# Altium PCB My_Ship_PCB1.PcbDoc
Units mm, origin at the board's own origin, x right, y up, seen from the top; angles counter-clockwise.
Board outline 152.4 x 101.6 mm, 2 copper layers (Top Layer, Bottom Layer); 104 components, 33 nets, 352 pads, 0 vias.
Unrouted connection lines stored in the file: 1.
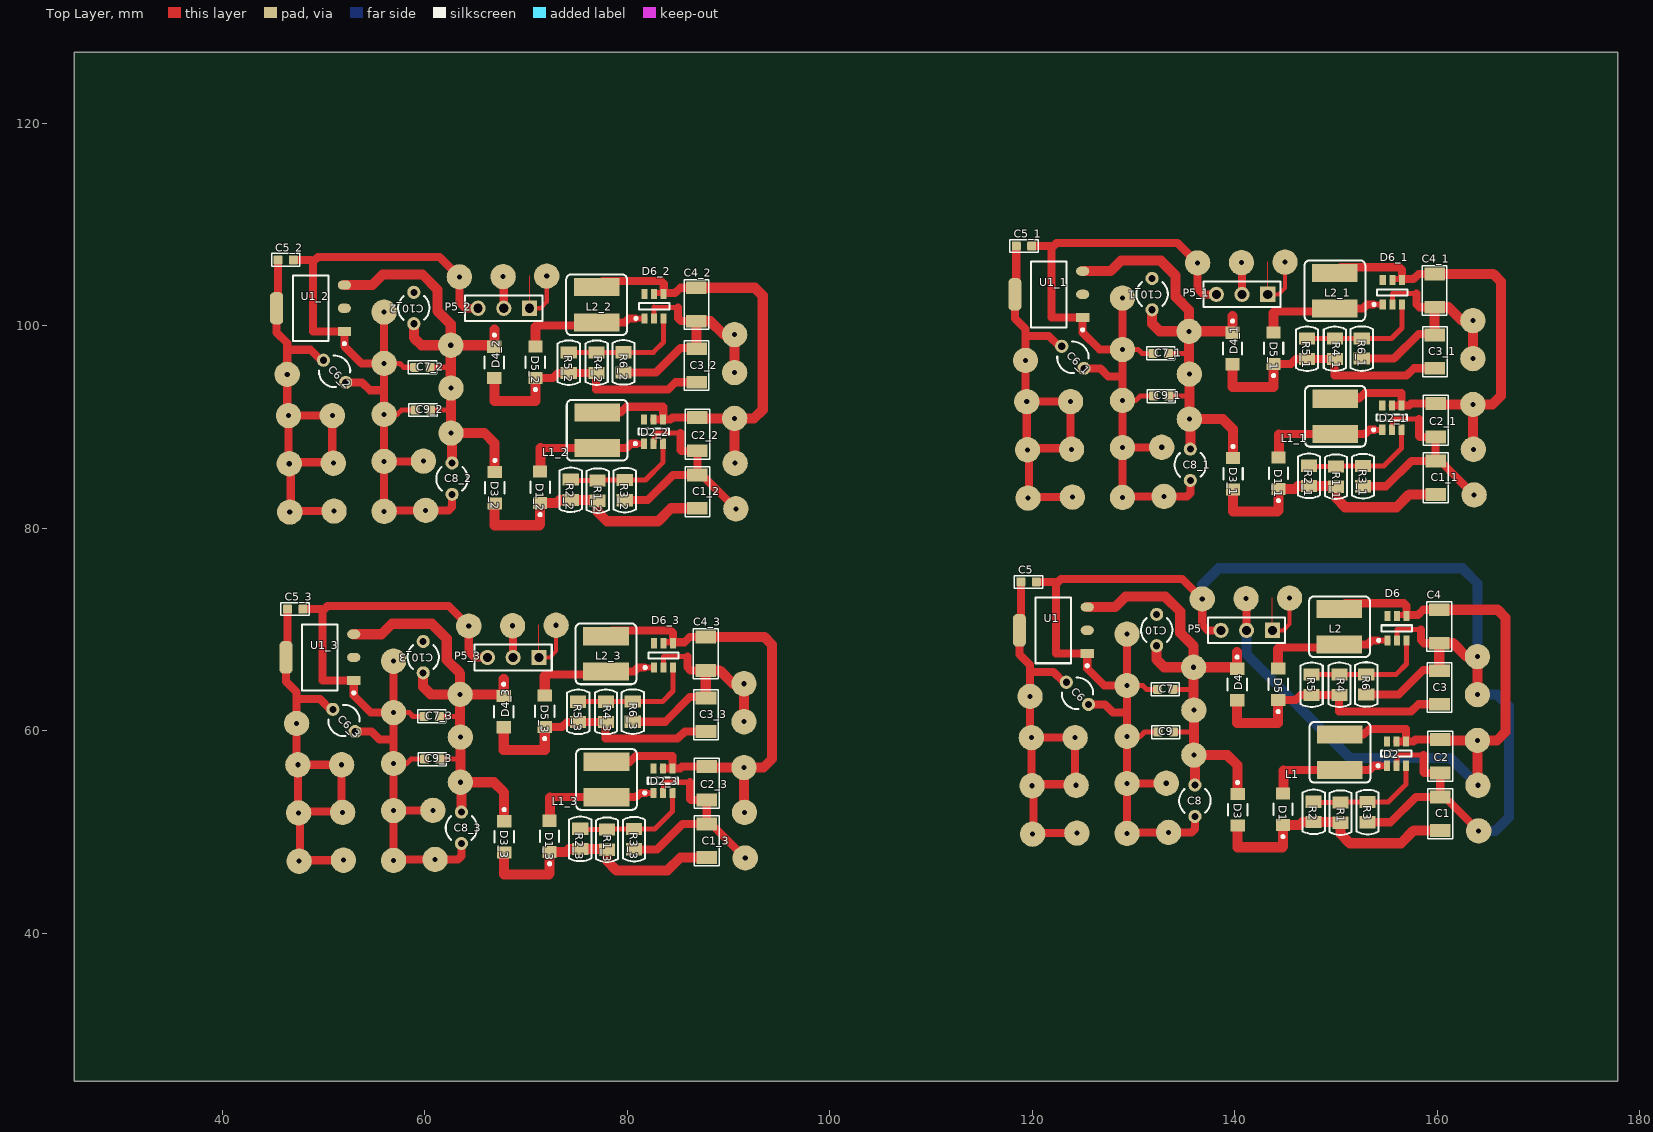
[diagram p0: Top Layer view]
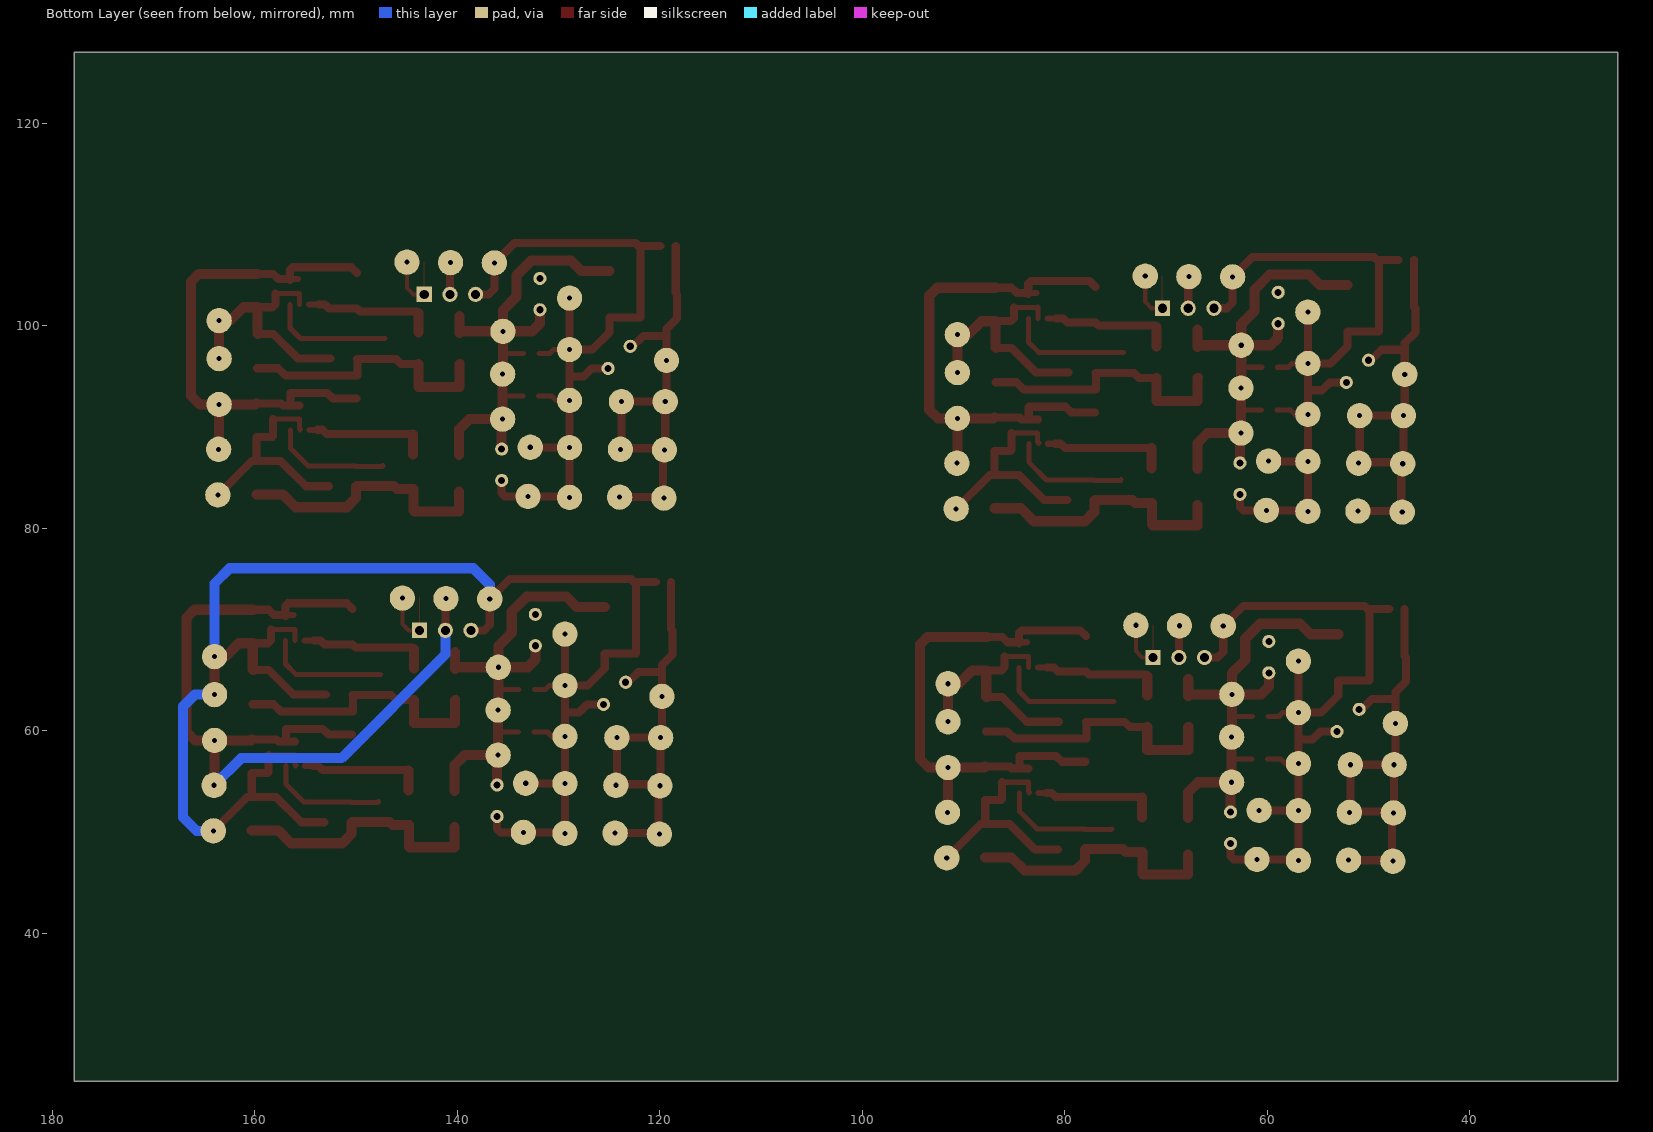
[diagram p1: Bottom Layer view, seen from below]
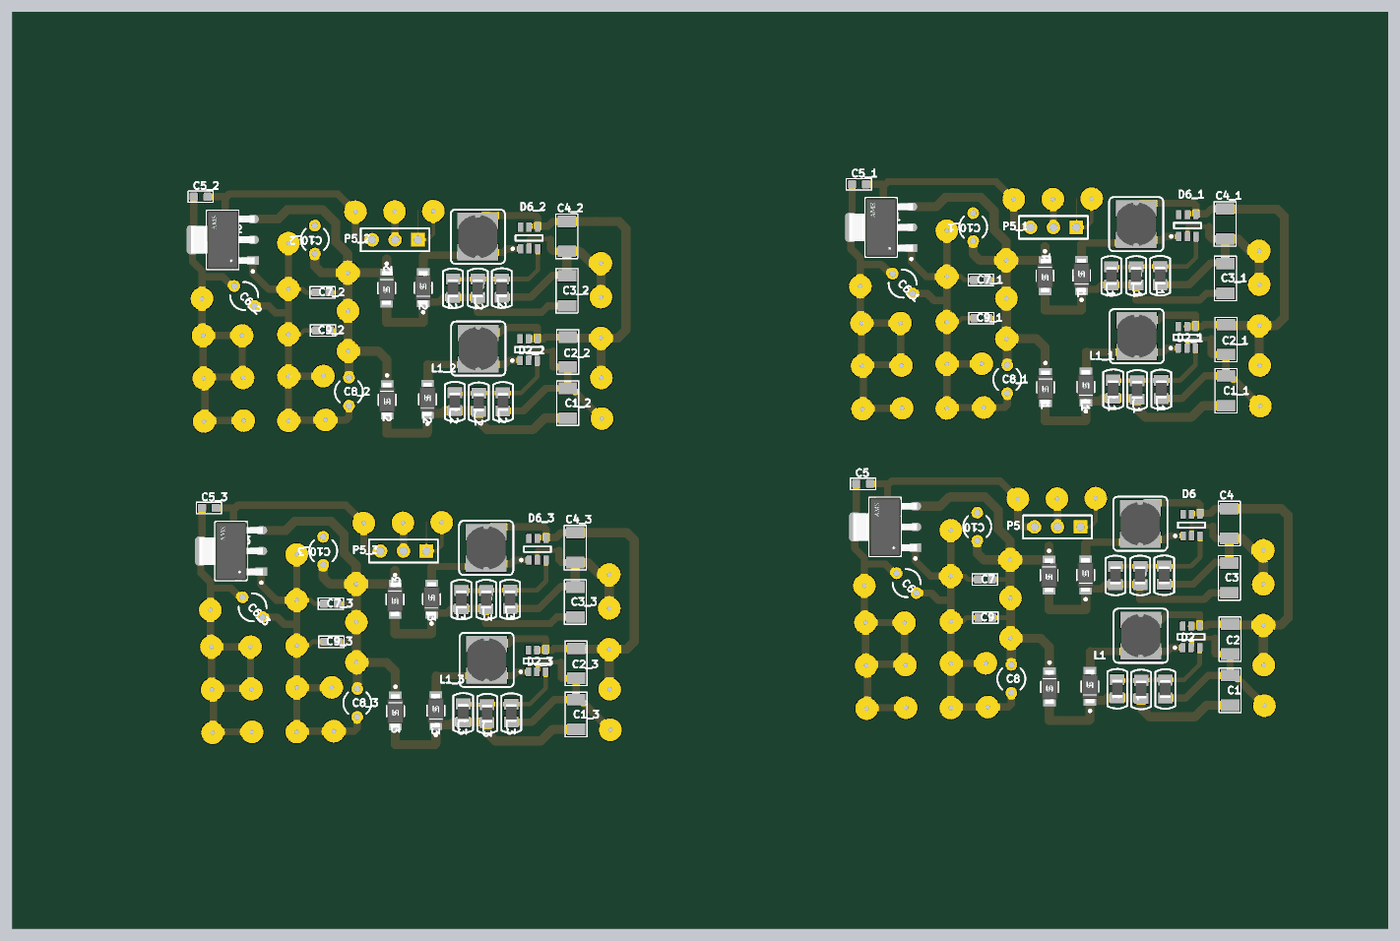
[diagram p2: 3D render of the assembled board from above, using the file's embedded part models]

## Layer stack, top to bottom
Top Solder: solder mask 0.0102, Solder Resist, Dk 3.5
Top Layer: signal copper 0.0356
Dielectric 1: dielectric 0.32, FR-4, Dk 4.8
Bottom Layer: signal copper 0.0356
Bottom Solder: solder mask 0.0102, Solder Resist, Dk 3.5

## Board outline
25.4,25.4 177.8,25.4 177.8,127 25.4,127

## Design rules (kind name [scope] priority, off if disabled: settings)
Clearance [All] p1: gap=0.3
PolygonConnect [All] p1: connectstyle=Relief reliefconductorwidth=0.254 reliefentries=4 polygonreliefangle="90 Angle" airgapwidth=0.254
RoutingVias [All] p1: holewidth=0.711 width=1.27 viastyle="Through Hole" minholewidth=0.711 minwidth=1.27 maxholewidth=0.711 maxwidth=1.27
SolderMaskExpansion [All] p1: expansion=0.102
Width [All] p1: maxlimit=1 minlimit=0.4 preferedwidth=0.8
30 further rules are at their usual default settings.

## Classes and differential pairs
component class My_Ship_Sheet1: C1 C3 C4 C5 C6 C7 C8 C9 C10 D1 D2 D3 D5 D6 L1 L2 P3 P5 R1 R2 R4 R5 U1

## Components (designator, comment, footprint, x,y, rotation, side; value= is the part's Value field where it differs from the comment)
C1 "Cap" C1206 160.275,51.825 r270 top
C1_1 "Cap" C1206 159.825,85 r270 top (schematic designator C1)
C1_2 "Cap" C1206 86.925,83.625 r270 top (schematic designator C1)
C1_3 "Cap" C1206 87.85,49.15 r270 top (schematic designator C1)
C2 "Cap" C1206 160.275,57.5 r90 top
C2_1 "Cap" C1206 159.825,90.675 r90 top (schematic designator C2)
C2_2 "Cap" C1206 86.925,89.3 r90 top (schematic designator C2)
C2_3 "Cap" C1206 87.85,54.825 r90 top (schematic designator C2)
C3 "Cap" C1206 160.2,64.275 r270 top
C3_1 "Cap" C1206 159.75,97.45 r270 top (schematic designator C3)
C3_2 "Cap" C1206 86.85,96.075 r270 top (schematic designator C3)
C3_3 "Cap" C1206 87.775,61.6 r270 top (schematic designator C3)
C4 "Cap" C1206 160.175,70.3 r90 top
C4_1 "Cap" C1206 159.725,103.475 r90 top (schematic designator C4)
C4_2 "Cap" C1206 86.825,102.1 r90 top (schematic designator C4)
C4_3 "Cap" C1206 87.75,67.625 r90 top (schematic designator C4)
C5 "C0603" C0603 119.625,74.7 r90 top
C5_1 "C0603" C0603 119.175,107.875 r90 top (schematic designator C5)
C5_2 "C0603" C0603 46.275,106.5 r90 top (schematic designator C5)
C5_3 "C0603" C0603 47.2,72.025 r90 top (schematic designator C5)
C6 "Capacitor-T" R38 124.45,63.7 r45 top
C6_1 "Capacitor-T" R38 124,96.875 r45 top (schematic designator C6)
C6_2 "Capacitor-T" R38 51.1,95.5 r45 top (schematic designator C6)
C6_3 "Capacitor-T" R38 52.025,61.025 r45 top (schematic designator C6)
C7 "C0603" C0603 133.125,64.1 r270 top
C7_1 "C0603" C0603 132.675,97.275 r270 top (schematic designator C7)
C7_2 "C0603" C0603 59.775,95.9 r270 top (schematic designator C7)
C7_3 "C0603" C0603 60.7,61.425 r270 top (schematic designator C7)
C8 "Capacitor-T" R38 136.05,53.1 r0 top
C8_1 "Capacitor-T" R38 135.6,86.275 r0 top (schematic designator C8)
C8_2 "Capacitor-T" R38 62.7,84.9 r0 top (schematic designator C8)
C8_3 "Capacitor-T" R38 63.625,50.425 r0 top (schematic designator C8)
C9 "C0603" C0603 133.175,59.875 r270 top
C9_1 "C0603" C0603 132.725,93.05 r270 top (schematic designator C9)
C9_2 "C0603" C0603 59.825,91.675 r270 top (schematic designator C9)
C9_3 "C0603" C0603 60.75,57.2 r270 top (schematic designator C9)
C10 "Capacitor-T" R38 132.275,69.95 r180 top
C10_1 "Capacitor-T" R38 131.825,103.125 r180 top (schematic designator C10)
C10_2 "Capacitor-T" R38 58.925,101.75 r180 top (schematic designator C10)
C10_3 "Capacitor-T" R38 59.85,67.275 r180 top (schematic designator C10)
D1 "SS34LWHRVG" FP-SS34LWH-MFG 144.75,52.25 r90 top
D1_1 "SS34LWHRVG" FP-SS34LWH-MFG 144.3,85.425 r90 top (schematic designator D1)
D1_2 "SS34LWHRVG" FP-SS34LWH-MFG 71.4,84.05 r90 top (schematic designator D1)
D1_3 "SS34LWHRVG" FP-SS34LWH-MFG 72.325,49.575 r90 top (schematic designator D1)
D2 "SX1308" SX1308 155.95,57.75 r90 top
D2_1 "SX1308" SX1308 155.5,90.925 r90 top (schematic designator D2)
D2_2 "SX1308" SX1308 82.6,89.55 r90 top (schematic designator D2)
D2_3 "SX1308" SX1308 83.525,55.075 r90 top (schematic designator D2)
D3 "SS34LWHRVG" FP-SS34LWH-MFG 140.275,52.2 r270 top
D3_1 "SS34LWHRVG" FP-SS34LWH-MFG 139.825,85.375 r270 top (schematic designator D3)
D3_2 "SS34LWHRVG" FP-SS34LWH-MFG 66.925,84 r270 top (schematic designator D3)
D3_3 "SS34LWHRVG" FP-SS34LWH-MFG 67.85,49.525 r270 top (schematic designator D3)
D4 "SS34LWHRVG" FP-SS34LWH-MFG 140.225,64.575 r270 top
D4_1 "SS34LWHRVG" FP-SS34LWH-MFG 139.775,97.75 r270 top (schematic designator D4)
D4_2 "SS34LWHRVG" FP-SS34LWH-MFG 66.875,96.375 r270 top (schematic designator D4)
D4_3 "SS34LWHRVG" FP-SS34LWH-MFG 67.8,61.9 r270 top (schematic designator D4)
D5 "SS34LWHRVG" FP-SS34LWH-MFG 144.275,64.6 r90 top
D5_1 "SS34LWHRVG" FP-SS34LWH-MFG 143.825,97.775 r90 top (schematic designator D5)
D5_2 "SS34LWHRVG" FP-SS34LWH-MFG 70.925,96.4 r90 top (schematic designator D5)
D5_3 "SS34LWHRVG" FP-SS34LWH-MFG 71.85,61.925 r90 top (schematic designator D5)
D6 "SX1308" SX1308 156,70.125 r90 top
D6_1 "SX1308" SX1308 155.55,103.3 r90 top (schematic designator D6)
D6_2 "SX1308" SX1308 82.65,101.925 r90 top (schematic designator D6)
D6_3 "SX1308" SX1308 83.575,67.45 r90 top (schematic designator D6)
L1 "Coil" МДГ-1 150.375,57.875 r90 top
L1_1 "Coil" МДГ-1 149.925,91.05 r90 top (schematic designator L1)
L1_2 "Coil" МДГ-1 77.025,89.675 r90 top (schematic designator L1)
L1_3 "Coil" МДГ-1 77.95,55.2 r90 top (schematic designator L1)
L2 "Coil" МДГ-1 150.325,70.275 r90 top
L2_1 "Coil" МДГ-1 149.875,103.45 r90 top (schematic designator L2)
L2_2 "Coil" МДГ-1 76.975,102.075 r90 top (schematic designator L2)
L2_3 "Coil" МДГ-1 77.9,67.6 r90 top (schematic designator L2)
P5 "Header 3" HDR1X3 143.7,69.925 r180 top
P5_1 "Header 3" HDR1X3 143.25,103.1 r180 top (schematic designator P5)
P5_2 "Header 3" HDR1X3 70.35,101.725 r180 top (schematic designator P5)
P5_3 "Header 3" HDR1X3 71.275,67.25 r180 top (schematic designator P5)
R1 "R0805" R0805 150.425,51.925 r270 top
R1_1 "R0805" R0805 149.975,85.1 r270 top (schematic designator R1)
R1_2 "R0805" R0805 77.075,83.725 r270 top (schematic designator R1)
R1_3 "R0805" R0805 78,49.25 r270 top (schematic designator R1)
R2 "R0805" R0805 147.775,52 r270 top
R2_1 "R0805" R0805 147.325,85.175 r270 top (schematic designator R2)
R2_2 "R0805" R0805 74.425,83.8 r270 top (schematic designator R2)
R2_3 "R0805" R0805 75.35,49.325 r270 top (schematic designator R2)
R3 "R0805" R0805 153.1,51.975 r90 top
R3_1 "R0805" R0805 152.65,85.15 r90 top (schematic designator R3)
R3_2 "R0805" R0805 79.75,83.775 r90 top (schematic designator R3)
R3_3 "R0805" R0805 80.675,49.3 r90 top (schematic designator R3)
R4 "R0805" R0805 150.325,64.55 r270 top
R4_1 "R0805" R0805 149.875,97.725 r270 top (schematic designator R4)
R4_2 "R0805" R0805 76.975,96.35 r270 top (schematic designator R4)
R4_3 "R0805" R0805 77.9,61.875 r270 top (schematic designator R4)
R5 "R0805" R0805 147.575,64.55 r270 top
R5_1 "R0805" R0805 147.125,97.725 r270 top (schematic designator R5)
R5_2 "R0805" R0805 74.225,96.35 r270 top (schematic designator R5)
R5_3 "R0805" R0805 75.15,61.875 r270 top (schematic designator R5)
R6 "R0805" R0805 152.975,64.575 r90 top
R6_1 "R0805" R0805 152.525,97.75 r90 top (schematic designator R6)
R6_2 "R0805" R0805 79.625,96.375 r90 top (schematic designator R6)
R6_3 "R0805" R0805 80.55,61.9 r90 top (schematic designator R6)
U1 "AMS1117-3.3" FP-AMS1117-IPC_B 122.075,69.925 r180 top
U1_1 "AMS1117-3.3" FP-AMS1117-IPC_B 121.625,103.1 r180 top (schematic designator U1)
U1_2 "AMS1117-3.3" FP-AMS1117-IPC_B 48.725,101.725 r180 top (schematic designator U1)
U1_3 "AMS1117-3.3" FP-AMS1117-IPC_B 49.65,67.25 r180 top (schematic designator U1)

## Footprints (in the part's own frame and the unit in brackets; to place one, negate y for a bottom-side part, rotate by r counter-clockwise, add the part's x,y. Pads: shape width x height; smd on the part's side, far side on the other; paste and mask are expansions set on the pad)
C0603 [mil]
  rrect25% 35x35 smd: 1(0,30) 2(0,-30)
  silkscreen extent -25,-55 25,55, body extent -18,-36 19,32, height 51
C1206 [mil]
  rect 50x80 smd: 1(-65,0) 2(65,0)
  silkscreen extent -97,-48 97,48, body extent -81,-45 82,47, height 79
FP-AMS1117-IPC_B [mm]
  rect 1.304x0.912 smd paste+0 mask+0: 1(-3.345,2.29)
  rrect100% 1.304x0.912 smd paste+0 mask+0: 2(-3.345,0) 3(-3.345,-2.29)
  rrect70% 1.304x3.222 smd paste+0 mask+0: 4(3.345,0)
  silkscreen extent -3.47,-3.25 1.75,3.62, body extent -4.25,-3.5 4.25,3.5, height 0.25
FP-SS34LWH-MFG [mm]
  rect 1.2x1.4 smd paste+0 mask+0: 1(-1.55,0) 2(1.55,0)
  silkscreen extent -2.82,-0.95 0.58,0.95, body extent -2.25,-1.05 2.25,1.05, height 0.25
HDR1X3 [mm] "Connector; Header; 3 Position"
  rect 1.5x1.5 hole 0.9: 1(0,0)
  round 1.5 hole 0.9: 2(2.54,0) 3(5.08,0)
  silkscreen extent -1.27,-1.27 6.35,1.27
R38 [mm] "Crystal, Thru-Hole; 2 Leads; Body 3.1 x 8.2 mm (Dia.xH)"
  round 1.3 hole 0.7: 1(0,1.55) 2(0,-1.55)
  silkscreen extent -1.55,-1.19 1.55,1.17
R0805 [mm] "2012M"
  rect 1.2x1.6 smd: 1(-1,0) 2(1,0)
  silkscreen extent -2.2,-1.1 2.2,1.1, body extent -1,-0.6 1,0.6, height 0.5
SX1308 [mm] "SOT23, 6-Leads, Body 2,90x2,45mm, Pitch 0,95mm, IPC Medium Density"
  rect 1x0.6 smd: 1(-1.2,0.95) 2(-1.2,0) 3(-1.2,-0.95) 4(1.2,-0.95) 5(1.2,0) 6(1.2,0.95)
  silkscreen extent -1.32,-1.5 0.3,1.92, body extent -0.7,-1.5 0.7,1.5, height 1.1
МДГ-1 [mm]
  rect 1.8x4.5 smd: 1(-1.75,0) 2(1.75,0)
  Top Layer pour cut-out: -0.85,2.25 0.85,2.25 0.85,-2.25 -0.85,-2.25
  silkscreen extent -3,-3 3,3, body extent -2.4,-2.15 2.4,2.15, height 3.5

## Part data
C1 C1_1 C1_2 C1_3 C2 C2_1 C2_2 C2_3 C3 C3_1 C3_2 C3_3 C4 C4_1 C4_2 C4_3: "Capacitor"
C5 C5_1 C5_2 C5_3 C7 C7_1 C7_2 C7_3 C9 C9_1 C9_2 C9_3: library part Cap, "Capacitor"
D1 D1_1 D1_2 D1_3 D3 D3_1 D3_2 D3_3 D4 D4_1 D4_2 D4_3 D5 D5_1 D5_2 D5_3: library part CMP-15604-000001-1, "DIODE SCHOTTKY 40V 3A SOD123W"
L1 L1_1 L1_2 L1_3 L2 L2_1 L2_2 L2_3: library part МДГ1-1500
P5 P5_1 P5_2 P5_3: "Header, 3-Pin"
R1 R1_1 R1_2 R1_3 R2 R2_1 R2_2 R2_3 R3 R3_1 R3_2 R3_3 R4 R4_1 R4_2 R4_3 R5 R5_1 R5_2 R5_3 R6 R6_1 R6_2 R6_3: library part Res1, "Resistor"
U1 U1_1 U1_2 U1_3: library part CMP-209535-000001-1, "LDO Voltage Regulators 1A, 3.3V"

## Free pads (board coordinates)
  round 2.5 hole 0.5: 3(72.05,104.9) 3(72.975,70.425) 3(144.95,106.275) 3(145.4,73.1) 4(63.425,104.825) 4(64.35,70.35) 4(67.75,104.85) 4(68.675,70.375) 4(136.325,106.2) 4(136.775,73.025) 4(140.65,106.225) 4(141.1,73.05) 7(90.6,99.125) 7(91.525,64.65) 7(163.5,100.5) 7(163.95,67.325) 8(90.725,81.925) 8(91.65,47.45) 8(163.625,83.3) 8(164.075,50.125) 9(90.6,95.375) 9(91.525,60.9) 9(163.5,96.75) 9(163.95,63.575) 10(90.6,90.85) 10(90.65,86.425) 10(91.525,56.375) 10(91.575,51.95) 10(163.5,92.225) 10(163.55,87.8) 10(163.95,59.05) 10(164,54.625) 11(62.575,98.075) 11(63.5,63.6) 11(135.475,99.45) 11(135.925,66.275) 12(62.6,93.85) 12(63.525,59.375) 12(135.5,95.225) 12(135.95,62.05) 13(62.6,89.4) 13(63.525,54.925) 13(135.5,90.775) 13(135.95,57.6) 15(56,101.35) 15(56.925,66.875) 15(128.9,102.725) 15(129.35,69.55) 16(56,96.275) 16(56.925,61.8) 16(128.9,97.65) 16(129.35,64.475) 17(56,91.25) 17(56.925,56.775) 17(128.9,92.625) 17(129.35,59.45) 18(56,86.6) 18(56.925,52.125) 18(128.9,87.975) 18(129.35,54.8) 19(56,81.675) 19(56.925,47.2) 19(59.875,86.625) 19(60.1,81.775) 19(60.8,52.15) 19(61.025,47.3) 19(128.9,83.05) 19(129.35,49.875) 19(132.775,88) 19(133,83.15) 19(133.225,54.825) 19(133.45,49.975) 20(46.425,95.2) 20(47.35,60.725) 20(119.325,96.575) 20(119.775,63.4) 21(50.975,86.425) 21(51.9,51.95) 21(123.875,87.8) 21(124.325,54.625) 22(51.05,81.7) 22(51.975,47.225) 22(123.95,83.075) 22(124.4,49.9) 23(46.55,91.125) 23(47.475,56.65) 23(50.875,91.125) 23(51.8,56.65) 23(119.45,92.5) 23(119.9,59.325) 23(123.775,92.5) 23(124.225,59.325) 24(46.625,86.375) 24(47.55,51.9) 24(119.525,87.75) 24(119.975,54.575) 25(46.675,81.6) 25(47.6,47.125) 25(119.575,82.975) 25(120.025,49.8)

## Nets (pads, with @x,y where several pads share a name; then routed paths per layer and width w, separated by ;. In a path a pad name is that pad's centre, name@x,y a point inside that pad or via, vN(x,y) a via of type N, cw(c..) or ccw(c..) an arc to the next point about the centre after c; other vN are vias at no path point)
GND: C1.1 C2.1 C3.1 C4.1 C5.2 C6.2 C7.2 C8.2 C9.2 C10.2 D2.2 D6.2 P5.3 pad.4@136.775,73.025 pad.7@163.95,67.325 pad.8@164.075,50.125 pad.9@163.95,63.575 pad.15@129.35,69.55 pad.16@129.35,64.475 pad.17@129.35,59.45 pad.18@129.35,54.8 pad.19@129.35,49.875 pad.19@133.45,49.975 pad.19@133.225,54.825 R3.1 R6.1 U1.1 | length 184
  Top Layer w0.5: pad.17@129.35,59.45 130.65,59.45 131.075,59.875 C9.2 ; pad.16@129.35,64.475 130.9,64.475 131.275,64.1 C7.2 ; D2.2 155.9,56.6 156.025,56.725 156.025,57.6 158.625,57.6 ; D6.2 156,70.025 156.025,70 158.375,70
  Top Layer w0.8: C5.2 122.15,74.7 122.335,74.515 ; C6.2 127.171,62.604 127.95,61.825 129.35,61.825 ; pad.15@129.225,69.675 129.35,69.55 pad.16@129.35,64.475 ; pad.19@133.225,54.825 133.2,54.8 pad.18@129.35,54.8 ; C8.2 136.05,50.3 135.725,49.975 133.45,49.975 129.45,49.975 129.35,49.875 pad.18@129.35,54.8 ; P5.3 137.325,69.925 136.775,70.475 136.775,73.025 134.8,75 122.82,75 122.335,74.515 ; R6.1 156.175,63.575 158.6,66 C3.1@160.126,66 ; R3.1 155.375,50.975 157.876,53.476 C1.1 ; 158.375,70 158.375,68.95 158.676,68.649 C4.1 ; 158.625,57.6 158.625,55.925 158.701,55.849 C2.1 C1.1 ; pad.8@164.075,50.125 160.724,53.476 C1.1 ; 122.335,74.515 122.335,67.635 U1.1 125.42,66.155 127.1,64.475 pad.16@129.35,64.475 ; pad.18@129.35,54.8 129.35,59.45 129.35,61.825 ; 129.35,61.825 pad.16@129.35,64.475
  Top Layer w1: C3.1@160.126,66 160.175,66.049 C4.1 161.551,68.649 162.875,67.325 163.95,67.325 pad.9@163.95,63.575
  Bottom Layer w1: pad.4@136.775,73.025 136.775,74.425 138.4,76.05 162.45,76.05 163.95,74.55 pad.7@163.95,67.325 ; pad.9@163.95,63.575 165.9,63.575 167.05,62.425 167.05,51.45 165.725,50.125 pad.8@164.075,50.125
LED_BACK: 
LED_FRONT: 
MOTOR_N: 
MOTOR_PIN_1: 
MOTOR_PIN_2: 
MOTOR_V: 
NetC1_2: C1.2 D1.1 D3.2 R1.2 R2.2 | length 26.2
  Top Layer w0.8: D1.1 D1.1@144.8,50.65
  Top Layer w1: D3.2@140.25,50.475 140.25,48.5 144.675,48.5 144.75,48.575 D1.1@144.75,50.55 ; D1.1 146.375,50.7 146.675,51 R2.2 150.35,51 R1.2 150.425,49.825 151.35,48.9 156.4,48.9 157.674,50.174 C1.2
NetC3_2: C3.2 D4.2 D5.1 R4.2 R5.2 | length 26.9
  Top Layer w0.8: D4.2@140.1,63.15 D4.2 ; D5.1 146,63.05 146.5,63.55 R5.2 R4.2 150.275,63.5 150.275,61.9 157.4,61.9 158.124,62.624 C3.2
  Top Layer w1: D4.2 140.225,60.775 144.275,60.775 D5.1
NetD1_2: D1.2 D2.1 L1.1 | length 12.4
  Top Layer w0.6: 154.25,56.55 D2.1
  Top Layer w0.8: 144.8,56.1 144.825,56.125 L1.1 153.3,56.125 153.725,56.55 154.25,56.55
  Top Layer w1: D1.2@144.8,54.125 144.8,56.1
NetD2_3: D2.3 R1.1 R2.1 R3.2 | length 11.7
  Top Layer w0.5: R2.1 147.85,52.925 R1.1 150.475,52.975 R3.2 155.15,52.975 156.9,54.725 D2.3
NetD5_2: D5.2 D6.1 L2.1 | length 13.1
  Top Layer w0.6: 154.15,68.925 D6.1
  Top Layer w0.8: 144.3,68.075 144.45,68.225 150.025,68.225 L2.1 153.1,68.525 153.5,68.925 154.15,68.925
  Top Layer w1: D5.2 144.275,68.075 144.3,68.075
NetD6_3: D6.3 R4.1 R5.1 R6.2 | length 12.1
  Top Layer w0.5: R5.1 R4.1 150.35,65.575 R6.2 155.925,65.575 156.95,66.6 D6.3
NetD7_2: 
NetD8_3: 
NetR7_2: 
NetR8_2: 
NetR9_2: 
NetR10_2: 
NetR11_2: 
NRF_CE: 
NRF_CSN: 
NRF_IRQ: 
NRF_MISO: 
NRF_MOSI: 
NRF_SCK: 
PWM_SERVO: 
SERVO_PWM: P5.1 pad.3@145.4,73.1 | length 7.7
  Top Layer w0: P5.1 143.7,73.15
  Top Layer w0.4: P5.1 144.775,69.925 145.4,70.55 pad.3@145.4,73.1
SWCLK: 
SWDIO: 
VCC: C2.2 C4.2 D2.4 D2.5 D6.4 D6.5 L1.2 L2.2 P5.2 pad.4@141.1,73.05 pad.10@163.95,59.05 pad.10@164,54.625 | length 87.8
  Top Layer w0.6: D6.5@156.15,71.425 D6.4@156.95,71.425
  Top Layer w0.8: pad.4@141.1,73.05 141.16,72.99 P5.2 ; L2.2 150.9,72.6 156.7,72.6 156.95,72.35 D6.4@156.95,71.425 ; L1.2 152.7,59.625 153.275,60.2 156.875,60.2 156.9,60.175 D2.4 ; D2.5@156,58.95 D2.4 ; D6.4 D6.4@156.95,71.425 ; C4.2 158.601,71.951 158.075,71.425 D6.4@156.95,71.425 ; C2.2 157.826,59.151 157.625,58.95 D2.4
  Top Layer w1: C4.2 165.949,71.951 166.725,71.175 166.725,59.9 165.875,59.05 pad.10@163.95,59.05 ; C2.2 160.376,59.05 pad.10@163.95,59.05 ; pad.10@164,54.625 163.95,54.675 pad.10@163.95,59.05
  Bottom Layer w1: P5.2 141.16,67.54 151.4,57.3 161.325,57.3 pad.10@164,54.625
VCC_3.3V: C5.1 C6.1 pad.20@119.775,63.4 pad.21@124.325,54.625 pad.22@124.4,49.9 pad.23@119.9,59.325 pad.23@124.225,59.325 pad.24@119.975,54.575 pad.25@120.025,49.8 U1.4 | length 47
  Top Layer w0.5: pad.21@124.225,54.725 pad.21@124.325,54.625
  Top Layer w0.8: C5.1 118.863,70.058 U1.4 118.73,67.545 119.775,66.5 119.775,65.825 ; pad.24@119.9,54.525 pad.23@119.9,59.325 ; C6.1 123.104,64.796 122.075,65.825 119.775,65.825 ; pad.22@124.4,49.9 120.125,49.9 120.125,54.725 124.225,54.725 124.225,59.325 pad.23@119.9,59.325 ; 119.775,65.825 119.775,63.4 119.775,59.45 pad.23@119.9,59.325
VCC_8V: C7.1 C8.1 C9.1 C10.1 D3.1 D4.1 pad.11@135.925,66.275 pad.12@135.95,62.05 pad.13@135.95,57.6 U1.3 | length 50.7
  Top Layer w0.5: C7.1 135.875,64.1 135.925,64.15 ; C9.1 135.95,59.875
  Top Layer w1: U1.3 128.165,72.215 129.2,73.25 133.125,73.25 134.6,71.775 134.6,69.675 135.925,68.35 pad.11@135.925,66.275 ; C10.1 132.275,67.025 133.025,66.275 pad.11@135.925,66.275 ; C8.1 136.05,57.5 pad.13@135.95,57.6 ; 140.225,67.8 D4.1 140.075,66.275 pad.11@135.925,66.275 ; D3.1@140.25,54.05 140.25,56.6 139.25,57.6 pad.13@135.95,57.6 ; pad.11@135.925,66.275 135.925,64.15 135.925,62.075 135.95,62.05 135.95,59.875 pad.13@135.95,57.6
pads on no net: C1_1.1 C1_1.2 C1_2.1 C1_2.2 C1_3.1 C1_3.2 C2_1.1 C2_1.2 C2_2.1 C2_2.2 C2_3.1 C2_3.2 C3_1.1 C3_1.2 C3_2.1 C3_2.2 C3_3.1 C3_3.2 C4_1.1 C4_1.2 C4_2.1 C4_2.2 C4_3.1 C4_3.2 C5_1.1 C5_1.2 C5_2.1 C5_2.2 C5_3.1 C5_3.2 C6_1.1 C6_1.2 C6_2.1 C6_2.2 C6_3.1 C6_3.2 C7_1.1 C7_1.2 C7_2.1 C7_2.2 C7_3.1 C7_3.2 C8_1.1 C8_1.2 C8_2.1 C8_2.2 C8_3.1 C8_3.2 C9_1.1 C9_1.2 C9_2.1 C9_2.2 C9_3.1 C9_3.2 C10_1.1 C10_1.2 C10_2.1 C10_2.2 C10_3.1 C10_3.2 D1_1.1 D1_1.2 D1_2.1 D1_2.2 D1_3.1 D1_3.2 D2.6 D2_1.1 D2_1.2 D2_1.3 D2_1.4 D2_1.5 D2_1.6 D2_2.1 D2_2.2 D2_2.3 D2_2.4 D2_2.5 D2_2.6 D2_3.1 D2_3.2 D2_3.3 D2_3.4 D2_3.5 D2_3.6 D3_1.1 D3_1.2 D3_2.1 D3_2.2 D3_3.1 D3_3.2 D4_1.1 D4_1.2 D4_2.1 D4_2.2 D4_3.1 D4_3.2 D5_1.1 D5_1.2 D5_2.1 D5_2.2 D5_3.1 D5_3.2 D6.6 D6_1.1 D6_1.2 D6_1.3 D6_1.4 D6_1.5 D6_1.6 D6_2.1 D6_2.2 D6_2.3 D6_2.4 D6_2.5 D6_2.6 D6_3.1 D6_3.2 D6_3.3 D6_3.4 D6_3.5 D6_3.6 L1_1.1 L1_1.2 L1_2.1 L1_2.2 L1_3.1 L1_3.2 L2_1.1 L2_1.2 L2_2.1 L2_2.2 L2_3.1 L2_3.2 P5_1.1 P5_1.2 P5_1.3 P5_2.1 P5_2.2 P5_2.3 P5_3.1 P5_3.2 P5_3.3 R1_1.1 R1_1.2 R1_2.1 R1_2.2 R1_3.1 R1_3.2 R2_1.1 R2_1.2 R2_2.1 R2_2.2 R2_3.1 R2_3.2 R3_1.1 R3_1.2 R3_2.1 R3_2.2 R3_3.1 R3_3.2 R4_1.1 R4_1.2 R4_2.1 R4_2.2 R4_3.1 R4_3.2 R5_1.1 R5_1.2 R5_2.1 R5_2.2 R5_3.1 R5_3.2 R6_1.1 R6_1.2 R6_2.1 R6_2.2 R6_3.1 R6_3.2 U1.2 U1_1.1 U1_1.2 U1_1.3 U1_1.4 U1_2.1 U1_2.2 U1_2.3 U1_2.4 U1_3.1 U1_3.2 U1_3.3 U1_3.4
copper on no net: | length 1181.3
  Top Layer w0: 70.35,101.725 70.35,104.95 ; 71.275,67.25 71.275,70.475 ; 143.25,103.1 143.25,106.325
  Top Layer w0.4: 70.35,101.725 71.425,101.725 72.05,102.35 72.05,104.9 ; 71.275,67.25 72.35,67.25 72.975,67.875 72.975,70.425 ; 143.25,103.1 144.325,103.1 144.95,103.725 144.95,106.275
  Top Layer w0.5: 50.875,86.525 50.975,86.425 ; 51.8,52.05 51.9,51.95 ; 56,91.25 57.3,91.25 57.725,91.675 59.063,91.675 ; 56,96.275 57.55,96.275 57.925,95.9 59.013,95.9 ; 56.925,56.775 58.225,56.775 58.65,57.2 59.988,57.2 ; 56.925,61.8 58.475,61.8 58.85,61.425 59.938,61.425 ; 60.537,95.9 62.525,95.9 62.575,95.95 ; 60.587,91.675 62.6,91.675 ; 61.462,61.425 63.45,61.425 63.5,61.475 ; 61.512,57.2 63.525,57.2 ; 74.225,97.35 76.975,97.35 77,97.375 79.625,97.375 82.575,97.375 83.6,98.4 83.6,100.725 ; 74.425,84.8 74.5,84.725 77.075,84.725 77.125,84.775 79.75,84.775 81.8,84.775 83.55,86.525 83.55,88.35 ; 75.15,62.875 77.9,62.875 77.925,62.9 80.55,62.9 83.5,62.9 84.525,63.925 84.525,66.25 ; 75.35,50.325 75.425,50.25 78,50.25 78.05,50.3 80.675,50.3 82.725,50.3 84.475,52.05 84.475,53.875 ; 82.6,88.35 82.55,88.4 82.675,88.525 82.675,89.4 85.275,89.4 ; 82.65,100.725 82.65,101.825 82.675,101.8 85.025,101.8 ; 83.525,53.875 83.475,53.925 83.6,54.05 83.6,54.925 86.2,54.925 ; 83.575,66.25 83.575,67.35 83.6,67.325 85.95,67.325 ; 123.775,87.9 123.875,87.8 ; 128.9,92.625 130.2,92.625 130.625,93.05 131.963,93.05 ; 128.9,97.65 130.45,97.65 130.825,97.275 131.913,97.275 ; 133.437,97.275 135.425,97.275 135.475,97.325 ; 133.487,93.05 135.5,93.05 ; 147.125,98.725 149.875,98.725 149.9,98.75 152.525,98.75 155.475,98.75 156.5,99.775 156.5,102.1 ; 147.325,86.175 147.4,86.1 149.975,86.1 150.025,86.15 152.65,86.15 154.7,86.15 156.45,87.9 156.45,89.725 ; 155.5,89.725 155.45,89.775 155.575,89.9 155.575,90.775 158.175,90.775 ; 155.55,102.1 155.55,103.2 155.575,103.175 157.925,103.175
  Top Layer w0.6: 80.8,100.725 81.7,100.725 ; 80.9,88.35 81.65,88.35 ; 81.725,66.25 82.625,66.25 ; 81.825,53.875 82.575,53.875 ; 82.8,103.225 83.6,103.225 ; 83.725,68.75 84.525,68.75 ; 153.7,102.1 154.6,102.1 ; 153.8,89.725 154.55,89.725 ; 155.7,104.6 156.5,104.6
  Top Layer w0.8: 45.513,106.5 45.513,101.858 45.38,101.725 45.38,99.345 46.425,98.3 46.425,97.625 ; 46.438,72.025 46.438,67.383 46.305,67.25 46.305,64.87 47.35,63.825 47.35,63.15 ; 46.55,86.325 46.55,91.125 ; 47.037,106.5 48.8,106.5 48.985,106.315 ; 47.475,51.85 47.475,56.65 ; 47.962,72.025 49.725,72.025 49.91,71.84 ; 50.004,96.596 49.754,96.596 48.725,97.625 46.425,97.625 ; 50.929,62.121 50.679,62.121 49.65,63.15 47.35,63.15 ; 51.05,81.7 46.775,81.7 46.775,86.525 50.875,86.525 50.875,91.125 46.55,91.125 ; 51.975,47.225 47.7,47.225 47.7,52.05 51.8,52.05 51.8,56.65 47.475,56.65 ; 52.196,94.404 53.821,94.404 54.6,93.625 56,93.625 ; 53.121,59.929 54.746,59.929 55.525,59.15 56.925,59.15 ; 55.875,101.475 56,101.35 56,96.275 ; 56.8,67 56.925,66.875 56.925,61.8 ; 59.875,86.625 59.85,86.6 56,86.6 ; 60.8,52.15 60.775,52.125 56.925,52.125 ; 62.7,83.35 62.7,82.1 62.375,81.775 60.1,81.775 56.1,81.775 56,81.675 56,86.6 ; 63.625,48.875 63.625,47.625 63.3,47.3 61.025,47.3 57.025,47.3 56.925,47.2 56.925,52.125 ; 65.27,101.725 63.975,101.725 63.425,102.275 63.425,104.825 61.45,106.8 49.47,106.8 48.985,106.315 ; 66.195,67.25 64.9,67.25 64.35,67.8 64.35,70.35 62.375,72.325 50.395,72.325 49.91,71.84 ; 66.75,94.95 66.875,94.825 ; 67.675,60.475 67.8,60.35 ; 67.75,104.85 67.81,104.79 67.81,101.725 ; 68.675,70.375 68.735,70.315 68.735,67.25 ; 70.925,94.85 72.65,94.85 73.15,95.35 74.225,95.35 76.975,95.35 76.925,95.3 76.925,93.7 84.05,93.7 84.774,94.424 86.85,94.424 ; 70.95,99.875 71.1,100.025 76.675,100.025 76.975,100.325 79.75,100.325 80.15,100.725 80.8,100.725 ; 71.4,82.5 71.45,82.45 ; 71.45,87.9 71.475,87.925 77.025,87.925 79.95,87.925 80.375,88.35 80.9,88.35 ; 71.85,60.375 73.575,60.375 74.075,60.875 75.15,60.875 77.9,60.875 77.85,60.825 77.85,59.225 84.975,59.225 85.699,59.949 87.775,59.949 ; 71.875,65.4 72.025,65.55 77.6,65.55 77.9,65.85 80.675,65.85 81.075,66.25 81.725,66.25 ; 72.325,48.025 72.375,47.975 ; 72.375,53.425 72.4,53.45 77.95,53.45 80.875,53.45 81.3,53.875 81.825,53.875 ; 76.975,103.825 77.55,104.4 83.35,104.4 83.6,104.15 83.6,103.225 ; 77.025,91.425 79.35,91.425 79.925,92 83.525,92 83.55,91.975 83.55,90.75 ; 77.9,69.35 78.475,69.925 84.275,69.925 84.525,69.675 84.525,68.75 ; 77.95,56.95 80.275,56.95 80.85,57.525 84.45,57.525 84.475,57.5 84.475,56.275 ; 79.625,95.375 82.825,95.375 85.25,97.8 86.776,97.8 ; 79.75,82.775 82.025,82.775 84.526,85.276 86.925,85.276 ; 80.55,60.9 83.75,60.9 86.175,63.325 87.701,63.325 ; 80.675,48.3 82.95,48.3 85.451,50.801 87.85,50.801 ; 82.65,90.75 83.55,90.75 ; 83.575,56.275 84.475,56.275 ; 83.6,103.125 83.6,103.225 ; 84.525,68.65 84.525,68.75 ; 85.025,101.8 85.025,100.75 85.326,100.449 86.825,100.449 ; 85.275,89.4 85.275,87.725 85.351,87.649 86.925,87.649 86.925,85.276 ; 85.95,67.325 85.95,66.275 86.251,65.974 87.75,65.974 ; 86.2,54.925 86.2,53.25 86.276,53.174 87.85,53.174 87.85,50.801 ; 86.825,103.751 85.251,103.751 84.725,103.225 83.6,103.225 ; 86.925,90.951 84.476,90.951 84.275,90.75 83.55,90.75 ; 87.75,69.276 86.176,69.276 85.65,68.75 84.525,68.75 ; 87.85,56.476 85.401,56.476 85.2,56.275 84.475,56.275 ; 90.725,81.925 87.374,85.276 86.925,85.276 ; 91.65,47.45 88.299,50.801 87.85,50.801 ; 118.413,107.875 118.413,103.233 118.28,103.1 118.28,100.72 119.325,99.675 119.325,99 ; 119.45,87.7 119.45,92.5 ; 119.937,107.875 121.7,107.875 121.885,107.69 ; 122.904,97.971 122.654,97.971 121.625,99 119.325,99 ; 123.95,83.075 119.675,83.075 119.675,87.9 123.775,87.9 123.775,92.5 119.45,92.5 ; 125.096,95.779 126.721,95.779 127.5,95 128.9,95 ; 128.775,102.85 128.9,102.725 128.9,97.65 ; 132.775,88 132.75,87.975 128.9,87.975 ; 135.6,84.725 135.6,83.475 135.275,83.15 133,83.15 129,83.15 128.9,83.05 128.9,87.975 ; 138.17,103.1 136.875,103.1 136.325,103.65 136.325,106.2 134.35,108.175 122.37,108.175 121.885,107.69 ; 139.65,96.325 139.775,96.2 ; 140.65,106.225 140.71,106.165 140.71,103.1 ; 143.825,96.225 145.55,96.225 146.05,96.725 147.125,96.725 149.875,96.725 149.825,96.675 149.825,95.075 156.95,95.075 157.674,95.799 159.75,95.799 ; 143.85,101.25 144,101.4 149.575,101.4 149.875,101.7 152.65,101.7 153.05,102.1 153.7,102.1 ; 144.3,83.875 144.35,83.825 ; 144.35,89.275 144.375,89.3 149.925,89.3 152.85,89.3 153.275,89.725 153.8,89.725 ; 149.875,105.2 150.45,105.775 156.25,105.775 156.5,105.525 156.5,104.6 ; 149.925,92.8 152.25,92.8 152.825,93.375 156.425,93.375 156.45,93.35 156.45,92.125 ; 152.525,96.75 155.725,96.75 158.15,99.175 159.676,99.175 ; 152.65,84.15 154.925,84.15 157.426,86.651 159.825,86.651 ; 155.55,92.125 156.45,92.125 ; 156.5,104.5 156.5,104.6 ; 157.925,103.175 157.925,102.125 158.226,101.824 159.725,101.824 ; 158.175,90.775 158.175,89.1 158.251,89.024 159.825,89.024 159.825,86.651 ; 159.725,105.126 158.151,105.126 157.625,104.6 156.5,104.6 ; 159.825,92.326 157.376,92.326 157.175,92.125 156.45,92.125 ; 163.625,83.3 160.274,86.651 159.825,86.651 ; 46.425,97.625 46.425,95.2 46.425,91.25 46.55,91.125 ; 47.35,63.15 47.35,60.725 47.35,56.775 47.475,56.65 ; 48.985,106.315 48.985,99.435 52.07,99.435 52.07,97.955 53.75,96.275 56,96.275 ; 49.91,71.84 49.91,64.96 52.995,64.96 52.995,63.48 54.675,61.8 56.925,61.8 ; 56,86.6 56,91.25 56,93.625 ; 56,93.625 56,96.275 ; 56.925,52.125 56.925,56.775 56.925,59.15 ; 56.925,59.15 56.925,61.8 ; 119.325,99 119.325,96.575 119.325,92.625 119.45,92.5 ; 121.885,107.69 121.885,100.81 124.97,100.81 124.97,99.33 126.65,97.65 128.9,97.65 ; 128.9,87.975 128.9,92.625 128.9,95 ; 128.9,95 128.9,97.65
  Top Layer w1: 52.07,104.015 54.815,104.015 55.85,105.05 59.775,105.05 61.25,103.575 61.25,101.475 62.575,100.15 62.575,98.075 ; 52.995,69.54 55.74,69.54 56.775,70.575 60.7,70.575 62.175,69.1 62.175,67 63.5,65.675 63.5,63.6 ; 58.925,100.2 58.925,98.825 59.675,98.075 62.575,98.075 ; 59.85,65.725 59.85,64.35 60.6,63.6 63.5,63.6 ; 62.7,86.45 62.7,89.3 62.6,89.4 ; 63.625,51.975 63.625,54.825 63.525,54.925 ; 66.875,94.825 66.875,92.575 70.925,92.575 70.925,94.85 ; 66.875,99.6 66.875,97.925 66.725,98.075 62.575,98.075 ; 66.9,82.275 66.9,80.3 71.325,80.3 71.4,80.375 71.4,82.35 ; 66.9,85.85 66.9,88.4 65.9,89.4 62.6,89.4 ; 67.8,60.35 67.8,58.1 71.85,58.1 71.85,60.375 ; 67.8,65.125 67.8,63.45 67.65,63.6 63.5,63.6 ; 67.825,47.8 67.825,45.825 72.25,45.825 72.325,45.9 72.325,47.875 ; 67.825,51.375 67.825,53.925 66.825,54.925 63.525,54.925 ; 70.925,97.95 70.925,99.875 70.95,99.875 ; 71.4,82.5 73.025,82.5 73.325,82.8 74.425,82.8 77,82.8 77.075,82.725 77.075,81.625 78,80.7 83.05,80.7 84.324,81.974 86.925,81.974 ; 71.45,85.925 71.45,87.9 ; 71.85,63.475 71.85,65.4 71.875,65.4 ; 72.325,48.025 73.95,48.025 74.25,48.325 75.35,48.325 77.925,48.325 78,48.25 78,47.15 78.925,46.225 83.975,46.225 85.249,47.499 87.85,47.499 ; 72.375,51.45 72.375,53.425 ; 86.776,97.8 86.825,97.849 86.825,100.449 88.201,100.449 89.525,99.125 90.6,99.125 90.6,95.375 ; 86.825,103.751 92.599,103.751 93.375,102.975 93.375,91.7 92.525,90.85 90.6,90.85 ; 86.925,90.951 87.026,90.85 90.6,90.85 ; 87.701,63.325 87.75,63.374 87.75,65.974 89.126,65.974 90.45,64.65 91.525,64.65 91.525,60.9 ; 87.75,69.276 93.524,69.276 94.3,68.5 94.3,57.225 93.45,56.375 91.525,56.375 ; 87.85,56.476 87.951,56.375 91.525,56.375 ; 90.65,86.425 90.6,86.475 90.6,90.85 ; 91.575,51.95 91.525,52 91.525,56.375 ; 124.97,105.39 127.715,105.39 128.75,106.425 132.675,106.425 134.15,104.95 134.15,102.85 135.475,101.525 135.475,99.45 ; 131.825,101.575 131.825,100.2 132.575,99.45 135.475,99.45 ; 135.6,87.825 135.6,90.675 135.5,90.775 ; 139.775,96.2 139.775,93.95 143.825,93.95 143.825,96.225 ; 139.775,100.975 139.775,99.3 139.625,99.45 135.475,99.45 ; 139.8,83.65 139.8,81.675 144.225,81.675 144.3,81.75 144.3,83.725 ; 139.8,87.225 139.8,89.775 138.8,90.775 135.5,90.775 ; 143.825,99.325 143.825,101.25 143.85,101.25 ; 144.3,83.875 145.925,83.875 146.225,84.175 147.325,84.175 149.9,84.175 149.975,84.1 149.975,83 150.9,82.075 155.95,82.075 157.224,83.349 159.825,83.349 ; 144.35,87.3 144.35,89.275 ; 159.676,99.175 159.725,99.224 159.725,101.824 161.101,101.824 162.425,100.5 163.5,100.5 163.5,96.75 ; 159.725,105.126 165.499,105.126 166.275,104.35 166.275,93.075 165.425,92.225 163.5,92.225 ; 159.825,92.326 159.926,92.225 163.5,92.225 ; 163.55,87.8 163.5,87.85 163.5,92.225 ; 62.575,98.075 62.575,95.95 62.575,93.875 62.6,93.85 62.6,91.675 62.6,89.4 ; 63.5,63.6 63.5,61.475 63.5,59.4 63.525,59.375 63.525,57.2 63.525,54.925 ; 135.475,99.45 135.475,97.325 135.475,95.25 135.5,95.225 135.5,93.05 135.5,90.775

## Text inside footprints (layer, text, board x,y; h text height)
L1: Mechanical 13 "Check!" at 150.775,54.775 h0.8 r90
L1_1: Mechanical 13 "Check!" at 150.325,87.95 h0.8 r90
L1_2: Mechanical 13 "Check!" at 77.425,86.575 h0.8 r90
L1_3: Mechanical 13 "Check!" at 78.35,52.1 h0.8 r90
L2: Mechanical 13 "Check!" at 150.725,67.175 h0.8 r90
L2_1: Mechanical 13 "Check!" at 150.275,100.35 h0.8 r90
L2_2: Mechanical 13 "Check!" at 77.375,98.975 h0.8 r90
L2_3: Mechanical 13 "Check!" at 78.3,64.5 h0.8 r90